# Altium PCB PCB_main.PcbDoc
Units mil, origin at the board's own origin, x right, y up, seen from the top; angles counter-clockwise.
Board outline 3000 x 1300 mil, 2 copper layers (Top Layer, Bottom Layer); 10 components, 22 nets, 107 pads, 5 vias.
Unrouted connection lines stored in the file: 43.
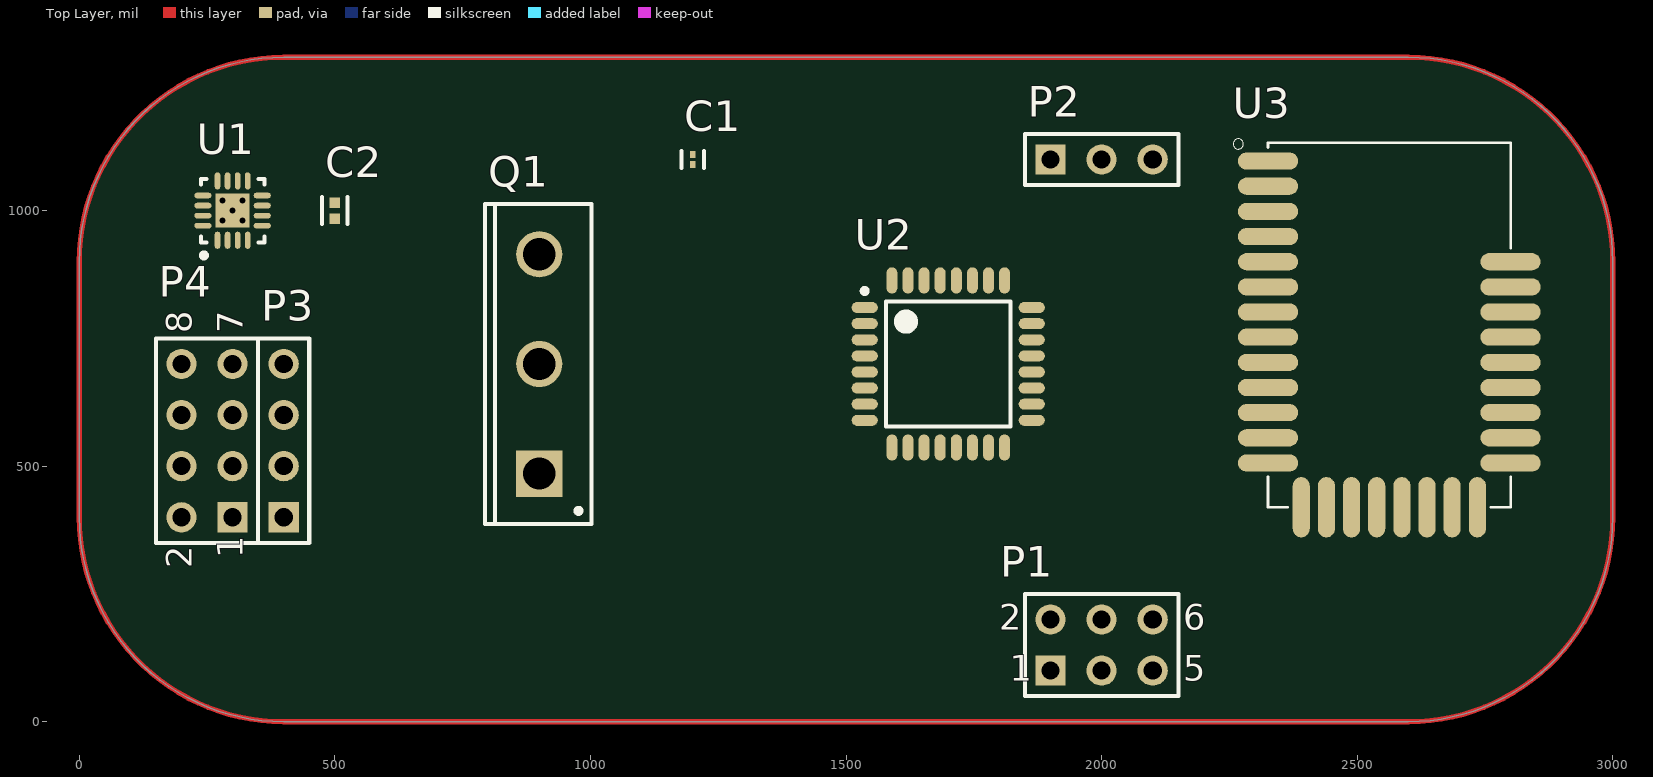
[diagram p0: Top Layer view]
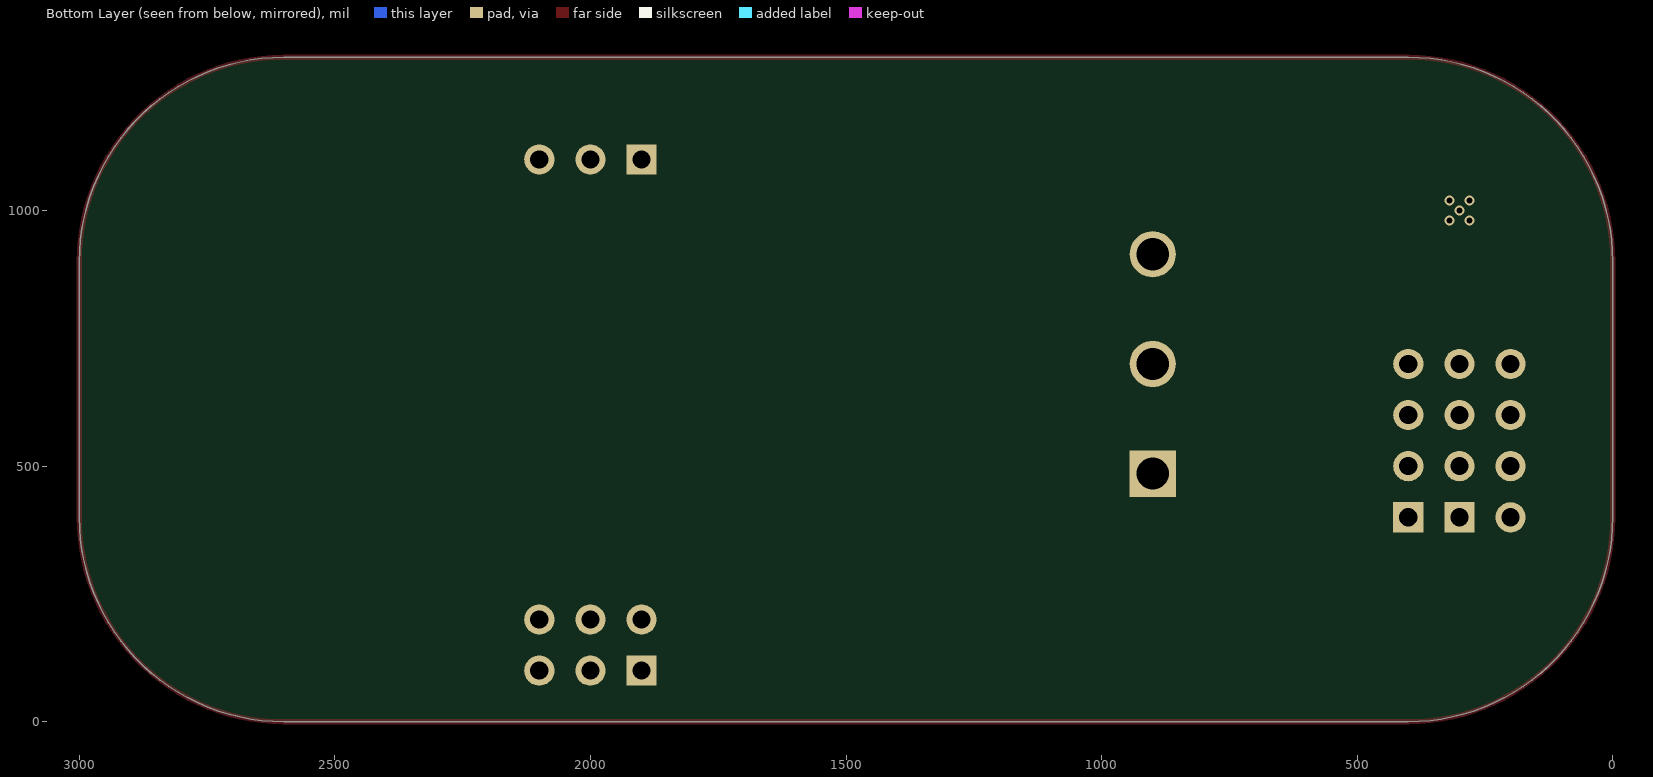
[diagram p1: Bottom Layer view, seen from below]

## Layer stack, top to bottom
Top Solder: solder mask 0.4, Solder Resist, Dk 3.5
Top Layer: signal copper 1.4
Dielectric 1: dielectric 12.6, FR-4, Dk 4.8
Bottom Layer: signal copper 1.4
Bottom Solder: solder mask 0.4, Solder Resist, Dk 3.5

## Board outline
0,400 0,900 cw(c400,900) 400,1300 2600,1300 cw(c2600,900) 3000,900 3000,400 cw(c2600,400) 2600,0 400,0 cw(c400,400)

## Design rules (kind name [scope] priority, off if disabled: settings)
Clearance [All] p1: gap=10 ignorepadtopadclearanceinfootprint=FALSE except(0: Arc-Hole Track-Hole SMDPad-Hole THPad-Hole Via-Hole Fill-Hole Poly-Hole Region-Hole Text-Hole)
PolygonConnect [All] p1: connectstyle=Relief reliefconductorwidth=10 reliefentries=4 polygonreliefangle="90 Angle" airgapwidth=10
RoutingVias [All] p1: holewidth=28 width=50 viastyle="Through Hole" minholewidth=28 minwidth=50 maxholewidth=28 maxwidth=50
SolderMaskExpansion [All] p1: expansion=4 istentingtop=FALSE
Width [All] p1: maxlimit=10 minlimit=10 preferedwidth=10
30 further rules are at their usual default settings.

## Components (designator, comment, footprint, x,y, rotation, side; value= is the part's Value field where it differs from the comment)
C1 "0.1uF" FP-GRM033-0_03-IPC_C 1200,1100 r270 top
C2 "1uF" FP-C0402C105K8PACTU-MFG 500,1000 r90 top
P1 "Header 3X2" HDR2X3 1900,100 r0 top
P2 "Header 3" HDR1X3 1900,1100 r0 top
P3 "Header 4" HDR1X4 400,400 r90 top
P4 "Header 4X2" HDR2X4 300,400 r90 top
Q1 "IGBT-N" TO-247 900,700 r90 top
U1 "ADS7924IRTER" TI-RTE16-1700X1700TP_V 300,1000 r90 top
U2 "ATMEGA328PB-AU" ATML-32A_L 1700,700 r0 top
U3 "BLE112-A-V1C" BLUEGIGA_BLE112-A 2562.8,775.98 r0 top

## Footprints (in the part's own frame and the unit in brackets; to place one, negate y for a bottom-side part, rotate by r counter-clockwise, add the part's x,y. Pads: shape width x height; smd on the part's side, far side on the other; paste and mask are expansions set on the pad)
ATML-32A_L [mm] "TQFP, 32-Leads, Body 7x7mm, Pitch 0.8mm, IPC High Density"
  oval 1.3x0.55 smd: 1(-4.15,2.8) 2(-4.15,2) 3(-4.15,1.2) 4(-4.15,0.4) 5(-4.15,-0.4) 6(-4.15,-1.2) 7(-4.15,-2) 8(-4.15,-2.8) 17(4.15,-2.8) 18(4.15,-2) 19(4.15,-1.2) 20(4.15,-0.4) 21(4.15,0.4) 22(4.15,1.2) 23(4.15,2) 24(4.15,2.8)
  oval 0.55x1.3 smd: 9(-2.8,-4.15) 10(-2,-4.15) 11(-1.2,-4.15) 12(-0.4,-4.15) 13(0.4,-4.15) 14(1.2,-4.15) 15(2,-4.15) 16(2.8,-4.15) 25(2.8,4.15) 26(2,4.15) 27(1.2,4.15) 28(0.4,4.15) 29(-0.4,4.15) 30(-1.2,4.15) 31(-2,4.15) 32(-2.8,4.15)
  silkscreen extent -4.27,-3.1 3.1,3.75, body extent -4.5,-4.5 4.5,4.5, height 1.2
BLUEGIGA_BLE112-A [mm]
  oval 3x0.85 smd: 1(-6.025,8.15) 2(-6.025,6.9) 3(-6.025,5.65) 4(-6.025,4.4) 5(-6.025,3.15) 6(-6.025,1.9) 7(-6.025,0.65) 8(-6.025,-0.6) 9(-6.025,-1.85) 10(-6.025,-3.1) 11(-6.025,-4.35) 12(-6.025,-5.6) 13(-6.025,-6.85) 22(6.025,-6.85) 23(6.025,-5.6) 24(6.025,-4.35) 25(6.025,-3.1) 26(6.025,-1.85) 27(6.025,-0.6) 28(6.025,0.65) 29(6.025,1.9) 30(6.025,3.15)
  oval 0.85x3 smd: 14(-4.375,-9.05) 15(-3.125,-9.05) 16(-1.875,-9.05) 17(-0.625,-9.05) 18(0.625,-9.05) 19(1.875,-9.05) 20(3.125,-9.05) 21(4.375,-9.05)
  silkscreen extent -7.75,-9.05 6.02,9.25
FP-C0402C105K8PACTU-MFG [mm]
  rect 0.52x0.52 smd paste+0 mask+0: 1(-0.4,0) 2(0.4,0)
  silkscreen extent -0.67,-0.64 0.67,0.64, body extent -0.8,-0.4 0.8,0.4, height 0.25
FP-GRM033-0_03-IPC_C [mil]
  rect 13.94x10.34 smd paste+0 mask+0: 1(-10.01,0) 2(10.01,0)
  silkscreen extent -17,-22 17,22, body extent -21,-10 21,10, height 10
HDR1X3 [mm] "Connector; Header; 3 Position"
  rect 1.5x1.5 hole 0.9: 1(0,0)
  round 1.5 hole 0.9: 2(2.54,0) 3(5.08,0)
  silkscreen extent -1.27,-1.27 6.35,1.27
HDR1X4 [mm] "Connector; Header; 4 Position"
  rect 1.5x1.5 hole 0.9: 1(0,0)
  round 1.5 hole 0.9: 2(2.54,0) 3(5.08,0) 4(7.62,0)
  silkscreen extent -1.27,-1.27 8.89,1.27
HDR2X3 [mm] "Connector; Header; 3x2 Position"
  rect 1.5x1.5 hole 0.9: 1(0,0)
  round 1.5 hole 0.9: 2(0,2.54) 3(2.54,0) 4(2.54,2.54) 5(5.08,0) 6(5.08,2.54)
  silkscreen extent -1.27,-1.27 6.35,3.81
HDR2X4 [mm] "Connector; Header; 4x2 Position"
  rect 1.5x1.5 hole 0.9: 1(0,0)
  round 1.5 hole 0.9: 2(0,2.54) 3(2.54,0) 4(2.54,2.54) 5(5.08,0) 6(5.08,2.54) 7(7.62,0) 8(7.62,2.54)
  silkscreen extent -1.27,-1.27 8.89,3.81
TI-RTE16-1700X1700TP_V [mm] "QFN, 16-Leads, Body 3x3mm, Pitch 0.5mm, Thermal Pad 1.7x1.7mm"
  oval 0.85x0.28 smd: 1(-1.475,0.75) 2(-1.475,0.25) 3(-1.475,-0.25) 4(-1.475,-0.75) 9(1.475,-0.75) 10(1.475,-0.25) 11(1.475,0.25) 12(1.475,0.75)
  oval 0.28x0.85 smd: 5(-0.75,-1.475) 6(-0.25,-1.475) 7(0.25,-1.475) 8(0.75,-1.475) 13(0.75,1.475) 14(0.25,1.475) 15(-0.25,1.475) 16(-0.75,1.475)
  rect 1.7x1.7 smd: 17(0,0)
  silkscreen extent -2.35,-1.57 1.57,1.58, body extent -1.5,-1.5 1.5,1.5, height 0.8
TO-247 [mm] "SIP with Mounting Hole; 3 Leads; Body 20 x 15.6 x 5 mm (typ); Pitch 5.45 mm"
  rect 2.3x2.3 hole 1.6: 1(-5.45,0)
  round 2.3 hole 1.6: 2(0,0) 3(5.45,0)
  silkscreen extent -7.95,-2.6 7.95,2.7, body extent -7.95,-2.6 7.95,2.7, height 24.6

## Part data
C1: library part CMP-2010-01264-2, "Chip Multilayer Ceramic Capacitors for General Purpose, 0201, 0.10uF, X5R, 15%, 10%, 10V", Capacitance=100nF, Case Code (Imperial)=0201, Case Code (Metric)=0603, Dielectric=X5R, Max Operating Temperature=85°C, Min Operating Temperature=-55°C, Package Quantity=1, Tolerance=10%, Voltage=10V, Case/Package=0201, Depth=0.3mm, Height=0.3mm, Lead Free="Lead Free", Length=0.6mm, Mount="Surface Mount", Packaging="Tape and Reel", Radiation Hardening=No, REACH SVHC="No SVHC", Termination=SMD/SMT, Thickness=0.013inch, Voltage Rating=10V, Voltage Rating (DC)=10V, Weight=6E-06oz, Width=0.012inch
C2: library part CMP-2008-02081-2, "CAP CER 1UF 10V X5R 0402", Case Code (Imperial)=0402, Case Code (Metric)=1005, Dielectric=X5R, Dielectric Material=Ceramic, Max Operating Temperature=85°C, Min Operating Temperature=-55°C, Package Quantity=1, Tolerance=10%, Voltage=10V, Capacitance=1uF, Case/Package=0402, Construction=Flat, Contact Plating=Tin, Depth=0.5mm, Dissipation Factor=5%, Height=0.5mm, Lead Free="Lead Free", Length=1mm, Mount="Surface Mount", Number of Pins=2, Packaging="Tape and Reel", Radiation Hardening=No, REACH SVHC="No SVHC", RoHS Compliant=Yes, Series=C, Termination=SMD/SMT, Thickness=0.022inch, Voltage Rating=10V, Voltage Rating (DC)=10V, Width=0.5mm
P1: "Header, 3-Pin, Dual row", LatestRevisionDate=17-Jul-2002, LatestRevisionNote="Re-released for DXP Platform.", Publisher="Altium Limited"
P2: "Header, 3-Pin", LatestRevisionDate=17-Jul-2002, LatestRevisionNote="Re-released for DXP Platform.", Publisher="Altium Limited"
P3: "Header, 4-Pin", LatestRevisionDate=17-Jul-2002, LatestRevisionNote="Re-released for DXP Platform.", Publisher="Altium Limited"
P4: "Header, 4-Pin, Dual row", LatestRevisionDate=17-Jul-2002, LatestRevisionNote="Re-released for DXP Platform.", Publisher="Altium Limited"
Q1: "Insulated Gate Bipolar Transistor (N-Channel)", Code_JEDEC=TO-247-AC, ComponentLink1Description="Manufacturer Link", ComponentLink1URL=http://www.irf.com/, DatasheetVersion=PD-9.684A, LatestRevisionDate=17-Jul-2002, LatestRevisionNote="Re-released for DXP Platform.", PackageDescription="SIP with Mounting Hole; 3 Leads; Body 20 x 15.6 x 5 mm (typ); Pitch 5.45 mm", PackageReference=TO-247, Published=8-Jun-2000, Publisher="Altium Limited"
U1: library part CMP-0003-02167-1, "12-Bit, 4-Channel Mux Input SAR ADC with Intelligent System Power Control, -40 to 85 degC, 16-pin QFN (RTE16), Green (RoHS & no Sb/Br)", Analog Voltage AV/DD(Max)(V)=5.5, Analog Voltage AV/DD(Min)(V)=2.2, Manufacturer="Texas Instruments", # Input Channels=4, Architecture=SAR, Code_JEDEC=MO-220, ComponentLink1Description="Manufacturer URL", ComponentLink1URL=http://www.ti.com/, ComponentLink2Description=Datasheet, ComponentLink2URL=http://www.ti.com/general/docs/lit/getliterature.tsp?genericPartNumber=ADS7924&fileType=pdf, ComponentLink3Description="Package Specification", ComponentLink3URL=http://www.ti.com/litv/pdf/mpqf149c, DatasheetVersion=SBAS482A, Digital Supply(Max)(V)=5.5, Digital Supply(Min)(V)=1.65, Eco-Plan="Green (RoHS & no Sb/Br)", INL(Max)(+/-LSB)=1.5, Interface="Serial I2C", Mounting Technology="Surface Mount", PackageDescription="16-Pin Plastic Flat Pack, Body 3 x 3 mm, Pitch 0.5 mm", PackageReference=RTE16-1700X1700TP, PackageVersion="4205254/D, 01/2011", PartNumber=ADS7924IRTER, Resolution(Bits)=12, Sample Rate (max)(SPS)=100k, SubFamily="Precision ADC (<=10MSPS)"
U2: library part CMP-2000-07439-1, "AVR Microcontroller, 1.8 to 5.5 V, 32 KB Flash, 1 KB EEPROM, 2 KB SRAM, -40 to 85 degC, 32-Pin TQFP (32A), RoHS, Tray", Manufacturer=Microchip, Package Description="32-Pin Thin Profile Plastic Quad Flat Package, Body 7 x 7 mm, Pitch 0.8 mm", Package Reference=32A, Datasheet URL=http://ww1.microchip.com/downloads/en/DeviceDoc/40001906A.pdf, Datasheet Version="Rev. A, 04/2017", Manufacturer URL=http://www.microchip.com/, Mounting Technology=SurfaceMount, RoHSCompliant=false
U3: "Low Energy Bluetooth Module", Package=None, Availability=Unavailable, MP=BLE112-A-V1C, Price=None

## Via types
v1: diameter 19.68, hole 11.81, Top Layer to Bottom Layer, 5 vias

## Nets (pads, with @x,y where several pads share a name; then routed paths per layer and width w, separated by ;. In a path a pad name is that pad's centre, name@x,y a point inside that pad or via, vN(x,y) a via of type N, cw(c..) or ccw(c..) an arc to the next point about the centre after c; other vN are vias at no path point)
A0: P3.1 U1.12
A1: P3.2 U1.11
A2: P3.3 U1.10
A3: P3.4 U1.9
BT_DC: P2.2 U3.4
BT_DD: P2.1 U3.5
BT_RST: P2.3 U3.29
CLK: U1.3 U2.12
CS: U3.23
GND: C1.2 C2.2 P1.6 P4.2 P4.4 P4.6 P4.8 Q1.3 U1.5 U1.6 U1.7 U1.8 U2.5 U2.21 U3.1 U3.10 U3.21 U3.30
MI: U3.26
MISO: P1.1 U2.16
MO: U3.25
MOSI: P1.4 U2.15
NetC1_1: C1.1 U2.20
NetQ1_2: Q1.2 U1.1
RST: P1.5 U2.29
RX: U2.30
SCK: P1.3 U2.17
SS: U3.24
TX: U2.31
VCC: C2.1 P1.2 P4.1 P4.3 P4.5 P4.7 U1.15 U1.16 U2.4 U2.18 U3.2 U3.3 U3.20
pads on no net: Q1.1 U1.2 U1.4 U1.13 U1.14 U1.17 U2.1 U2.2 U2.3 U2.6 U2.7 U2.8 U2.9 U2.10 U2.11 U2.13 U2.14 U2.19 U2.22 U2.23 U2.24 U2.25 U2.26 U2.27 U2.28 U2.32 U3.6 U3.7 U3.8 U3.9 U3.11 U3.12 U3.13 U3.14 U3.15 U3.16 U3.17 U3.18 U3.19 U3.22 U3.27 U3.28
copper on no net: | length 7913.3
  Top Layer w10: 0,400 ccw(c400,400) 400,0 2600,0 ccw(c2600,400) 3000,400 3000,900 ccw(c2600,900) 2600,1300 400,1300 ccw(c400,900) 0,900 0,400
  other v1: 280.32,980.32 319.68,980.32 300,1000 280.32,1019.68 319.68,1019.68

## Text inside footprints (layer, text, board x,y; h text height)
P1: Top Overlay "6" at 2160,180 h50; Top Overlay "5" at 2160,80 h50; Top Overlay "2" at 1800,180 h50; Top Overlay "1" at 1820,80 h50
P4: Top Overlay "2" at 220,300 h50 r90; Top Overlay "1" at 320,320 h50 r90; Top Overlay "7" at 320,760 h50 r90; Top Overlay "8" at 220,760 h50 r90